# Altium PCB PCB1.PcbDoc
Units mm, origin at the board's own origin, x right, y up, seen from the top; angles counter-clockwise.
Board outline 212.3 x 70 mm, 2 copper layers (Top Layer, Bottom Layer); 72 components, 0 nets, 156 pads, 0 vias.
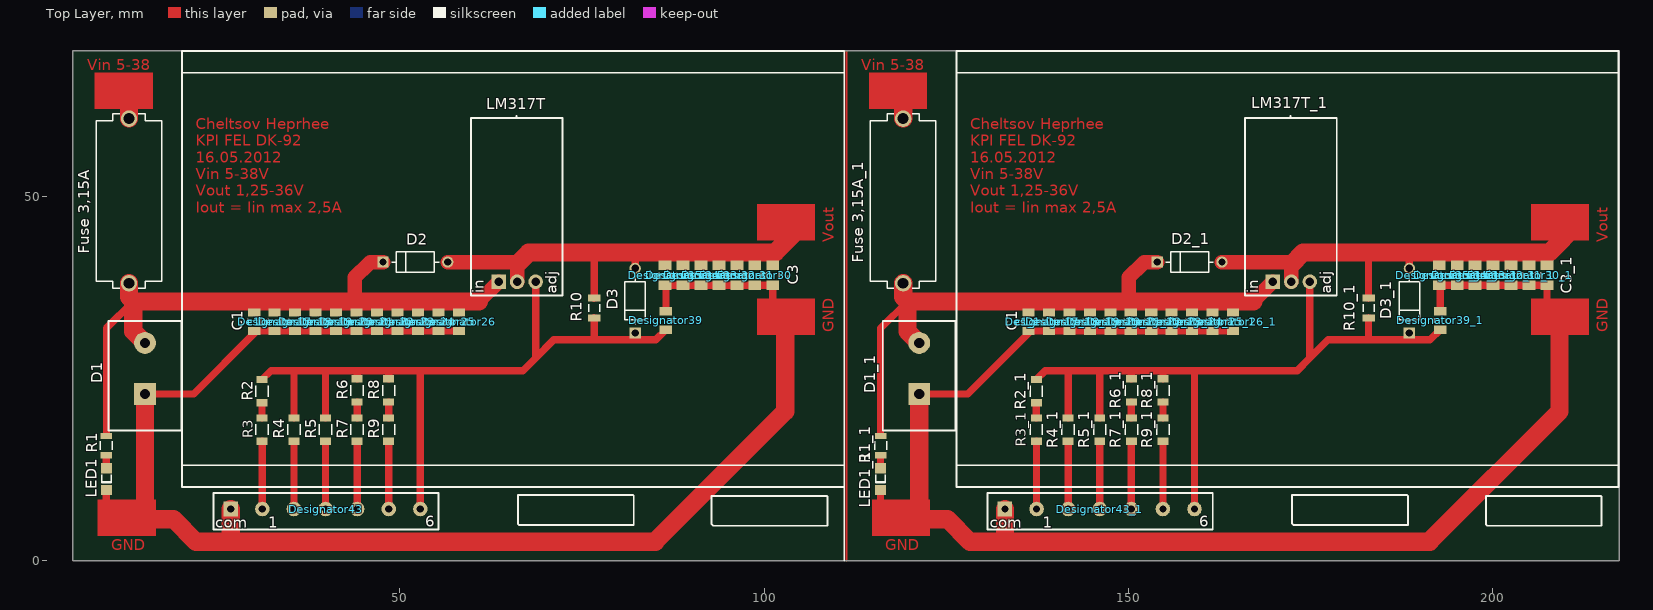
[diagram p0: Top Layer view]
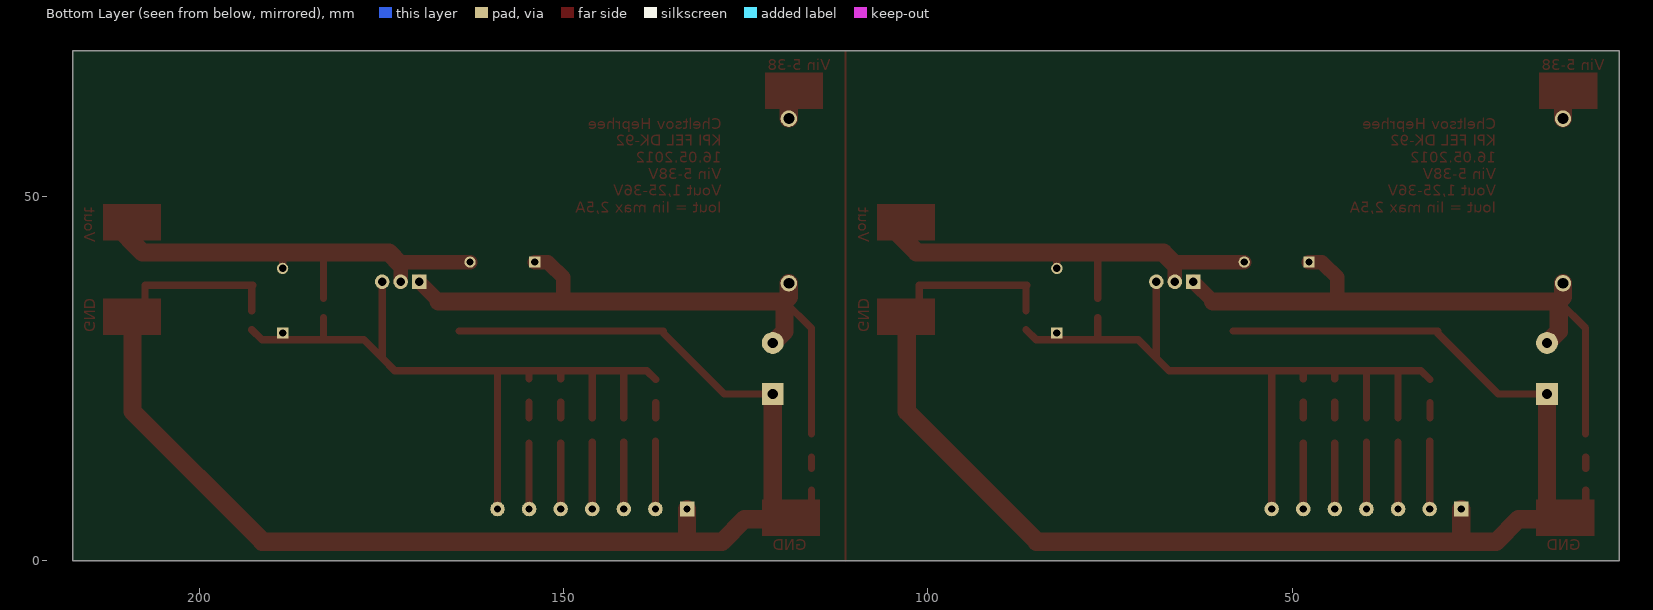
[diagram p1: Bottom Layer view, seen from below]

## Layer stack, top to bottom
Top Solder: solder mask 0.0102, Solder Resist, Dk 3.5
Top Layer: signal copper 0.0356
Dielectric 1: dielectric 0.32, FR-4, Dk 4.8
Bottom Layer: signal copper 0.0356
Bottom Solder: solder mask 0.0102, Solder Resist, Dk 3.5

## Board outline
5.1,0 217.4,0 217.4,70 5.1,70

## Design rules (kind name [scope] priority, off if disabled: settings)
Clearance [All] p1: gap=0.254 ignorepadtopadclearanceinfootprint=FALSE except(0: Arc-Hole Track-Hole SMDPad-Hole THPad-Hole Via-Hole Fill-Hole Poly-Hole Region-Hole Text-Hole)
PolygonConnect [All] p1: connectstyle=Relief reliefconductorwidth=0.254 reliefentries=4 polygonreliefangle="90 Angle" airgapwidth=0.254
RoutingVias [All] p1: holewidth=0.711 width=1.27 viastyle="Through Hole" minholewidth=0.711 minwidth=1.27 maxholewidth=0.711 maxwidth=1.27
SolderMaskExpansion [All] p1: expansion=0.102 istentingtop=FALSE
Width [All] p1: maxlimit=0.254 minlimit=0.254 preferedwidth=0.254
30 further rules are at their usual default settings.

## Components (designator, comment, footprint, x,y, rotation, side; value= is the part's Value field where it differs from the comment)
c1 "Comment" FP-CL31-IPC_C#1 30,32.824 r90 top
c1_1 "Comment" FP-CL31-IPC_C#1 136.3,32.824 r90 top
C3 "Comment" FP-CL31-IPC_B 101.2,39.2 r90 top
C3_1 "Comment" FP-CL31-IPC_B 207.5,39.2 r90 top
D1 "Comment" 10A10 15,26.9 r90 top
D1_1 "Comment" 10A10 121.3,26.9 r90 top
D2 "Comment" FP-1N4007-MFG 52.125,41 r0 top
D2_1 "Comment" FP-1N4007-MFG 158.425,41 r0 top
D3 "Comment" FP-1N4007-MFG 82.3,35.7 r90 top
D3_1 "Comment" FP-1N4007-MFG 188.6,35.7 r90 top
Designator17 "Comment" FP-CL31-IPC_C#1 32.81,32.824 r90 top
Designator17_1 "Comment" FP-CL31-IPC_C#1 139.11,32.824 r90 top
Designator18 "Comment" FP-CL31-IPC_C#1 35.62,32.824 r90 top
Designator18_1 "Comment" FP-CL31-IPC_C#1 141.92,32.824 r90 top
Designator19 "Comment" FP-CL31-IPC_C#1 38.43,32.824 r90 top
Designator19_1 "Comment" FP-CL31-IPC_C#1 144.73,32.824 r90 top
Designator20 "Comment" FP-CL31-IPC_C#1 41.24,32.824 r90 top
Designator20_1 "Comment" FP-CL31-IPC_C#1 147.54,32.824 r90 top
Designator21 "Comment" FP-CL31-IPC_C#1 44.05,32.824 r90 top
Designator21_1 "Comment" FP-CL31-IPC_C#1 150.35,32.824 r90 top
Designator22 "Comment" FP-CL31-IPC_C#1 46.86,32.824 r90 top
Designator22_1 "Comment" FP-CL31-IPC_C#1 153.16,32.824 r90 top
Designator23 "Comment" FP-CL31-IPC_C#1 49.67,32.824 r90 top
Designator23_1 "Comment" FP-CL31-IPC_C#1 155.97,32.824 r90 top
Designator24 "Comment" FP-CL31-IPC_C#1 52.48,32.824 r90 top
Designator24_1 "Comment" FP-CL31-IPC_C#1 158.78,32.824 r90 top
Designator25 "Comment" FP-CL31-IPC_C#1 55.29,32.824 r90 top
Designator25_1 "Comment" FP-CL31-IPC_C#1 161.59,32.824 r90 top
Designator26 "Comment" FP-CL31-IPC_C#1 58.1,32.824 r90 top
Designator26_1 "Comment" FP-CL31-IPC_C#1 164.4,32.824 r90 top
Designator30 "Comment" FP-CL31-IPC_B 98.733,39.2 r90 top
Designator30_1 "Comment" FP-CL31-IPC_B 205.033,39.2 r90 top
Designator31 "Comment" FP-CL31-IPC_B 96.267,39.2 r90 top
Designator31_1 "Comment" FP-CL31-IPC_B 202.567,39.2 r90 top
Designator32 "Comment" FP-CL31-IPC_B 93.8,39.2 r90 top
Designator32_1 "Comment" FP-CL31-IPC_B 200.1,39.2 r90 top
Designator33 "Comment" FP-CL31-IPC_B 91.333,39.2 r90 top
Designator33_1 "Comment" FP-CL31-IPC_B 197.633,39.2 r90 top
Designator34 "Comment" FP-CL31-IPC_B 88.867,39.2 r90 top
Designator34_1 "Comment" FP-CL31-IPC_B 195.167,39.2 r90 top
Designator35 "Comment" FP-CL31-IPC_B 86.4,39.2 r90 top
Designator35_1 "Comment" FP-CL31-IPC_B 192.7,39.2 r90 top
Designator39 "Comment" FP-CL31-IPC_C#2 86.529,33 r270 top
Designator39_1 "Comment" FP-CL31-IPC_C#2 192.829,33 r270 top
Designator43 "Comment" connecrot 39.7,6.7 r0 top
Designator43_1 "Comment" connecrot 146,6.7 r0 top
"Fuse 3,15A" "Comment" 696101000002 12.8,49.4 r90 top
"Fuse 3,15A_1" "Comment" 696101000002 119.1,49.4 r90 top
LED1 "Comment" 1206_A 9.698,11.2 r90 top
LED1_1 "Comment" 1206_A 115.998,11.2 r90 top
LM317T "Comment" lm317t 66.1,38.3 r0 top
LM317T_1 "Comment" lm317t 172.4,38.3 r0 top
R1 "Comment" FP-CR1206-IPC_C 9.7,15.8 r90 top
R1_1 "Comment" FP-CR1206-IPC_C 116,15.8 r90 top
R2 "Comment" FP-AC1206-MFG 31.078,23.272 r90 top
R2_1 "Comment" FP-AC1206-MFG 137.378,23.272 r90 top
R3 "Comment" FP-AC1206-MFG 31.078,18 r90 top
R3_1 "Comment" FP-AC1206-MFG 137.378,18 r90 top
R4 "Comment" FP-RT1206-MFG 35.451,18 r90 top
R4_1 "Comment" FP-RT1206-MFG 141.751,18 r90 top
R5 "Comment" FP-AC1206-MFG 39.788,18 r90 top
R5_1 "Comment" FP-AC1206-MFG 146.088,18 r90 top
R6 "Comment" FP-RT1206-MFG 44.125,23.4 r90 top
R6_1 "Comment" FP-RT1206-MFG 150.425,23.4 r90 top
R7 "Comment" FP-RT1206-MFG 44.125,18 r90 top
R7_1 "Comment" FP-RT1206-MFG 150.425,18 r90 top
R8 "Comment" FP-RT1206-MFG 48.463,23.4 r90 top
R8_1 "Comment" FP-RT1206-MFG 154.763,23.4 r90 top
R9 "Comment" FP-RT1206-MFG 48.463,18 r90 top
R9_1 "Comment" FP-RT1206-MFG 154.763,18 r90 top
R10 "Comment" RESC1206(3216)_L 76.7,34.7 r90 top
R10_1 "Comment" RESC1206(3216)_L 183,34.7 r90 top

## Footprints (in the part's own frame and the unit in brackets; to place one, negate y for a bottom-side part, rotate by r counter-clockwise, add the part's x,y. Pads: shape width x height; smd on the part's side, far side on the other; paste and mask are expansions set on the pad)
10A10 [mm]
  rect 3x3 hole 1.4: 1(-4,0)
  round 3 hole 1.4: 2(3,0)
  silkscreen extent -9,-5 6,5, body extent -8.3,-4.3 3.6,4.3, height 19.6
1206_A [mm] "Chip LED, 2-Leads, Body 3.2x1.6mm, IPC Medium Density"
  rect 1.4x1.5 smd: 1(-1.5,0) 2(1.5,0)
  silkscreen extent -0.5,-0.67 0.6,0.65, body extent -1.6,-0.8 1.6,0.8, height 0.68
696101000002 [mm] "FUSEHOLDER BLOCKS - PCB - CLIP COVER - THT"
  round 2.25 hole 1.5: 1(-11.3,0) 2(11.3,0)
  silkscreen extent -12,-4.5 12,4.5, body extent -12,-4.5 12,4.5, height 13.55
connecrot [mm]
  rect 2x2 hole 1: 1(-12.924,0.4)
  round 2 hole 1: 2(-8.587,0.4) 3(-4.249,0.4) 4(0.088,0.4) 5(4.425,0.4) 6(8.763,0.4) 7(13.1,0.4)
  silkscreen extent -15.3,-2.4 15.6,2.6
FP-1N4007-MFG [mm]
  rect 1.55x1.55 hole 1 paste-1000 mask+0: 1(-4.44,0)
  round 1.55 hole 1 paste-1000 mask+0: 2(4.44,0)
  silkscreen extent -3.26,-1.4 3.26,1.4, body extent -5.32,-1.5 5.32,1.5, height 0.25
FP-AC1206-MFG [mm]
  rect 1x1.5 smd paste+0 mask+0: 1(-1.6,0) 2(1.6,0)
  silkscreen extent -0.72,-0.85 0.72,0.85, body extent -2.2,-0.95 2.2,0.95, height 0.25
FP-CL31-IPC_B [mm]
  rect 1.305x1.758 smd paste+0 mask+0: 1(-1.376,0) 2(1.376,0)
  silkscreen extent -0.42,-0.88 0.42,0.88, body extent -2.28,-1.13 2.28,1.13, height 0.25
FP-CL31-IPC_C#1 [mm]
  rect 1.105x1.658 smd paste+0 mask+0: 1(-1.276,0) 2(1.276,0)
  silkscreen extent -0.42,-0.87 0.42,0.87, body extent -1.93,-0.97 1.93,0.97, height 0.25
FP-CL31-IPC_C#2 [mm]
  rect 1.154x1.706 smd paste+0 mask+0: 1(-1.276,0) 2(1.276,0)
  silkscreen extent -0.32,-0.8 0.32,0.8, body extent -1.95,-1 1.95,1, height 0.25
FP-CR1206-IPC_C [mil]
  rect 33.79x61.5 smd paste+0 mask+0: 1(-52.24,0) 2(52.24,0)
  silkscreen extent -24,-32 24,32, body extent -73,-36 73,36, height 10
FP-RT1206-MFG [mm]
  rect 1x1.5 smd paste+0 mask+0: 1(-1.6,0) 2(1.6,0)
  silkscreen extent -0.72,-0.85 0.72,0.85, body extent -2.2,-0.95 2.2,0.95, height 0.25
lm317t [mm]
  round 2 hole 1.2: 1(2.54,0) 2(0,0)
  rect 2x2 hole 1.2: 3(-2.54,0)
  silkscreen extent -6.35,-1.91 6.22,22.8, body extent -5,-0.25 5,21.55, height 4
RESC1206(3216)_L [mm] "Chip Resistor, Body 3.2x1.6mm, IPC High Density"
  rect 0.95x1.7 smd: 1(-1.35,0) 2(1.35,0)
  silkscreen extent -0.5,-0.75 0.5,0.75, body extent -1.67,-0.87 1.67,0.87, height 0.75

## Nets (pads, with @x,y where several pads share a name; then routed paths per layer and width w, separated by ;. In a path a pad name is that pad's centre, name@x,y a point inside that pad or via, vN(x,y) a via of type N, cw(c..) or ccw(c..) an arc to the next point about the centre after c; other vN are vias at no path point)
pads on no net: "Fuse 3,15A.1" "Fuse 3,15A.2" "Fuse 3,15A_1.1" "Fuse 3,15A_1.2" c1.1 c1.2 c1_1.1 c1_1.2 C3.1 C3.2 C3_1.1 C3_1.2 D1.1 D1.2 D1_1.1 D1_1.2 D2.1 D2.2 D2_1.1 D2_1.2 D3.1 D3.2 D3_1.1 D3_1.2 Designator17.1 Designator17.2 Designator17_1.1 Designator17_1.2 Designator18.1 Designator18.2 Designator18_1.1 Designator18_1.2 Designator19.1 Designator19.2 Designator19_1.1 Designator19_1.2 Designator20.1 Designator20.2 Designator20_1.1 Designator20_1.2 Designator21.1 Designator21.2 Designator21_1.1 Designator21_1.2 Designator22.1 Designator22.2 Designator22_1.1 Designator22_1.2 Designator23.1 Designator23.2 Designator23_1.1 Designator23_1.2 Designator24.1 Designator24.2 Designator24_1.1 Designator24_1.2 Designator25.1 Designator25.2 Designator25_1.1 Designator25_1.2 Designator26.1 Designator26.2 Designator26_1.1 Designator26_1.2 Designator30.1 Designator30.2 Designator30_1.1 Designator30_1.2 Designator31.1 Designator31.2 Designator31_1.1 Designator31_1.2 Designator32.1 Designator32.2 Designator32_1.1 Designator32_1.2 Designator33.1 Designator33.2 Designator33_1.1 Designator33_1.2 Designator34.1 Designator34.2 Designator34_1.1 Designator34_1.2 Designator35.1 Designator35.2 Designator35_1.1 Designator35_1.2 Designator39.1 Designator39.2 Designator39_1.1 Designator39_1.2 Designator43.1 Designator43.2 Designator43.3 Designator43.4 Designator43.5 Designator43.6 Designator43.7 Designator43_1.1 Designator43_1.2 Designator43_1.3 Designator43_1.4 Designator43_1.5 Designator43_1.6 Designator43_1.7 LED1.1 LED1.2 LED1_1.1 LED1_1.2 LM317T.1 LM317T.2 LM317T.3 LM317T_1.1 LM317T_1.2 LM317T_1.3 R1.1 R1.2 R1_1.1 R1_1.2 R2.1 R2.2 R2_1.1 R2_1.2 R3.1 R3.2 R3_1.1 R3_1.2 R4.1 R4.2 R4_1.1 R4_1.2 R5.1 R5.2 R5_1.1 R5_1.2 R6.1 R6.2 R6_1.1 R6_1.2 R7.1 R7.2 R7_1.1 R7_1.2 R8.1 R8.2 R8_1.1 R8_1.2 R9.1 R9.2 R9_1.1 R9_1.2 R10.1 R10.2 R10_1.1 R10_1.2
copper on no net: | length 1106.1
  Top Layer w0.254: 38,31.224 38.024,31.2 ; 40.353,31.2 40.7,31.547 41.047,31.2 ; 43.7,31.547 44.024,31.224 ; 43.776,31.2 43.8,31.224 ; 46.376,31.224 46.7,31.547 ; 49.6,31.547 49.847,31.3 ; 49.624,31.2 49.6,31.224 49.7,31.324 ; 52.253,31.3 52.5,31.547 ; 111.3,0 111.3,70 ; 144.3,31.224 144.324,31.2 ; 146.653,31.2 147,31.547 147.347,31.2 ; 150,31.547 150.324,31.224 ; 150.076,31.2 150.1,31.224 ; 152.676,31.224 153,31.547 ; 155.9,31.547 156.147,31.3 ; 155.924,31.2 155.9,31.224 156,31.324 ; 158.553,31.3 158.8,31.547
  Top Layer w1: 9.6,7.4 9.698,7.498 9.698,9.7 ; 9.698,12.7 9.698,14.19 9.7,14.192 ; 9.7,17.4 9.7,31.9 13.4,35.6 12.8,36.2 ; 15,22.9 21.676,22.9 30,31.224 ; 30,31.547 58.1,31.547 ; 31.078,19.6 31.078,21.672 ; 31.078,24.872 32.306,26.1 32.6,26.1 35.6,26.1 39.788,26.1 ; 31.113,7.1 31.113,16.387 ; 35.451,7.1 35.451,16.251 ; 35.451,19.6 35.451,25.951 ; 39.788,7.1 39.788,16.312 ; 39.788,19.6 39.788,26.1 ; 44.125,7.1 44.125,16.175 ; 44.125,19.6 44.125,21.8 ; 44.125,25 44.125,26.075 ; 48.463,7.1 48.463,16.163 ; 48.463,19.643 48.475,19.656 48.475,21.8 48.463,21.8 ; 48.463,25 48.463,26.087 ; 52.8,7.1 52.8,26.1 ; 68.64,38.3 68.64,27.84 ; 76.7,33.35 76.7,30.33 ; 76.7,36.05 76.7,42.2 ; 82.3,31.26 82.3,30.33 ; 82.3,40.14 82.3,42.3 82.4,42.4 ; 85.1,2.6 85.1,3 ; 86.4,37.824 101.2,37.824 101.2,34.9 101.1,34.8 ; 86.529,31.724 85.13,30.325 85.125,30.33 82.3,30.33 ; 86.529,34.276 86.529,37.695 ; 115.9,7.4 115.998,7.498 115.998,9.7 ; 115.998,12.7 115.998,14.19 116,14.192 ; 116,17.4 116,31.9 119.7,35.6 119.1,36.2 ; 121.3,22.9 127.976,22.9 136.3,31.224 ; 136.3,31.547 164.4,31.547 ; 137.378,19.6 137.378,21.672 ; 137.378,24.872 138.606,26.1 138.9,26.1 141.9,26.1 146.088,26.1 ; 137.413,7.1 137.413,16.387 ; 141.751,7.1 141.751,16.251 ; 141.751,19.6 141.751,25.951 ; 146.088,7.1 146.088,16.312 ; 146.088,19.6 146.088,26.1 ; 150.425,7.1 150.425,16.175 ; 150.425,19.6 150.425,21.8 ; 150.425,25 150.425,26.075 ; 154.763,7.1 154.763,16.163 ; 154.763,19.643 154.775,19.656 154.775,21.8 154.763,21.8 ; 154.763,25 154.763,26.087 ; 159.1,7.1 159.1,26.1 ; 174.94,38.3 174.94,27.84 ; 183,33.35 183,30.33 ; 183,36.05 183,42.2 ; 188.6,31.26 188.6,30.33 ; 188.6,40.14 188.6,42.3 188.7,42.4 ; 191.4,2.6 191.4,3 ; 192.7,37.824 207.5,37.824 207.5,34.9 207.4,34.8 ; 192.829,31.724 191.43,30.325 191.425,30.33 188.6,30.33 ; 192.829,34.276 192.829,37.695 ; 39.788,26.1 44.1,26.1 48.7,26.1 52.8,26.1 ; 52.8,26.1 66.9,26.1 68.64,27.84 ; 68.64,27.84 71.13,30.33 76.7,30.33 ; 76.7,30.33 82.3,30.33 ; 146.088,26.1 150.4,26.1 155,26.1 159.1,26.1 ; 159.1,26.1 173.2,26.1 174.94,27.84 ; 174.94,27.84 177.43,30.33 183,30.33 ; 183,30.33 188.6,30.33
  Top Layer w2: 43.8,35.9 43.8,38.9 45.7,40.8 ; 45.9,41 47.685,41 ; 56.565,41 66.4,41 ; 60.86,35.6 63.56,38.3 ; 66.1,38.3 66.1,40.7 ; 150.1,35.9 150.1,38.9 152,40.8 ; 152.2,41 153.985,41 ; 162.865,41 172.7,41 ; 167.16,35.6 169.86,38.3 ; 172.4,38.3 172.4,40.7
  Top Layer w2.5: 12.8,38.1 12.8,36.2 13.4,35.6 ; 12.8,60.7 12.8,63.4 ; 14.7,5.7 18.9,5.7 22,2.6 85.1,2.6 85.1,2.7 102.9,20.5 102.9,33.5 ; 15,6.5 15,16.127 15,22.9 ; 15,29.9 13.4,31.5 13.4,35.6 ; 26.776,2.776 26.776,7.1 ; 60.86,35.6 13.4,35.6 ; 66.1,40.7 67.7,42.3 101.525,42.3 101.525,42.325 105.475,46.275 ; 119.1,38.1 119.1,36.2 119.7,35.6 ; 119.1,60.7 119.1,63.4 ; 121,5.7 125.2,5.7 128.3,2.6 191.4,2.6 191.4,2.7 209.2,20.5 209.2,33.5 ; 121.3,6.5 121.3,16.127 121.3,22.9 ; 121.3,29.9 119.7,31.5 119.7,35.6 ; 133.076,2.776 133.076,7.1 ; 167.16,35.6 119.7,35.6 ; 172.4,40.7 174,42.3 207.825,42.3 207.825,42.325 211.775,46.275

## Other copper
Top Layer:
  rectangle: 205.3,31 213.3,36
  rectangle: 205.3,44 213.3,49
  rectangle: 114.4,62 122.4,67
  rectangle: 114.8,3.4 122.8,8.4
  rectangle: 8.5,3.4 16.5,8.4
  rectangle: 8.1,62 16.1,67
  rectangle: 99,44 107,49
  rectangle: 99,31 107,36
  text "Vin 5-38" at 7.054,67.354 h1.52
  text "Vin 5-38" at 113.354,67.354 h1.52
  text "Cheltsov Heprhee / KPI FEL DK-92 / 16.05.2012 / Vin 5-38V / Vout 1,25-36V / Iout = Iin max 2,5A" at 22,47.8 h1.52
  text "Cheltsov Heprhee / KPI FEL DK-92 / 16.05.2012 / Vin 5-38V / Vout 1,25-36V / Iout = Iin max 2,5A" at 128.3,47.8 h1.52
  text "Vout" at 109.546,43.754 h1.52 r90
  text "Vout" at 215.846,43.754 h1.52 r90
  text "GND" at 109.546,31.354 h1.52 r90
  text "GND" at 215.846,31.354 h1.52 r90
  text "GND" at 10.354,1.454 h1.52
  text "GND" at 116.654,1.454 h1.52

## Silkscreen, mask and mechanical layers (free items; w line width, h text height)
Top Overlay:
  lines w0.254: 20.2,13.1 111,13.1 ; 20.2,67 111,67 ; 111,0 111,10.1 ; 126.5,13.1 217.3,13.1 ; 126.5,67 217.3,67 ; 111,10.1 111,70 20.1,70 20.1,10.1 111,10.1 ; 66.2,5.1 66.4,4.9 82.1,4.9 82.1,8.9 82,9 66.2,9 66.2,5.1 ; 92.8,5 93,4.8 108.7,4.8 108.7,8.8 108.6,8.9 92.8,8.9 92.8,5 ; 126.4,10.1 217.3,10.1 217.3,70 126.4,70 126.4,10.1 ; 172.5,5.1 172.5,9 188.3,9 188.4,8.9 188.4,4.9 172.7,4.9 172.5,5.1 ; 199.1,5 199.1,8.9 214.9,8.9 215,8.8 215,4.8 199.3,4.8 199.1,5
  text "C1" at 28.446,31.554 h1.52 r90
  text "C1" at 134.746,31.554 h1.52 r90

## Text inside footprints (layer, text, board x,y; h text height)
Designator43: Top Overlay "6" at 53.454,4.654 h1.52; Top Overlay "1" at 31.954,4.554 h1.52; Top Overlay "com" at 24.654,4.554 h1.52
Designator43_1: Top Overlay "6" at 159.754,4.654 h1.52; Top Overlay "1" at 138.254,4.554 h1.52; Top Overlay "com" at 130.954,4.554 h1.52
LM317T: Top Overlay "adj" at 71.561,36.649 h1.52 r90; Top Overlay "in" at 61.546,36.754 h1.52 r90
LM317T_1: Top Overlay "adj" at 177.861,36.649 h1.52 r90; Top Overlay "in" at 167.846,36.754 h1.52 r90